# Altium PCB PCB.PcbDoc
Units mm, origin at the board's own origin, x right, y up, seen from the top; angles counter-clockwise.
Board outline 78 x 65 mm, 2 copper layers (Top Layer, Bottom Layer); 38 components, 35 nets, 139 pads, 3 vias.
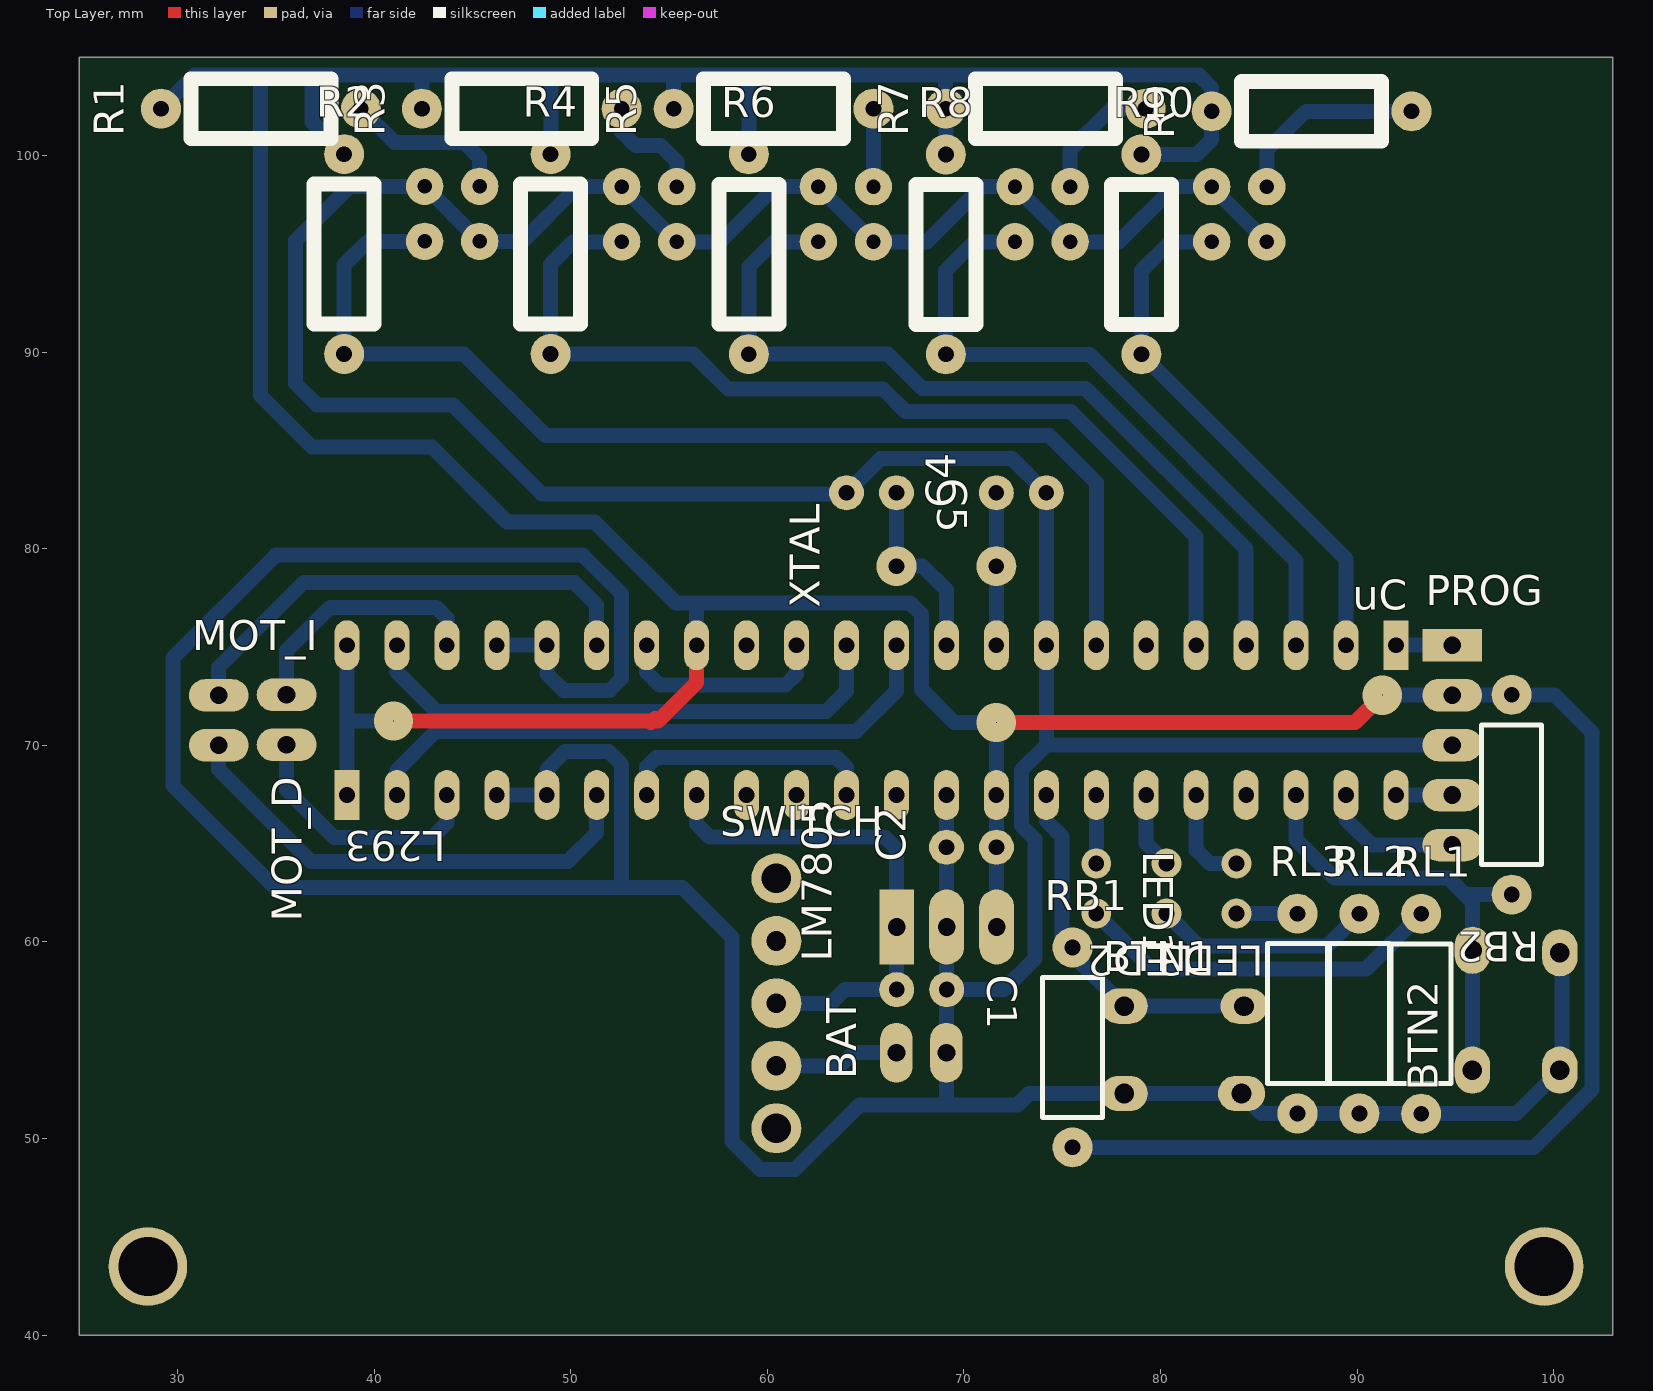
[diagram p0: Top Layer view]
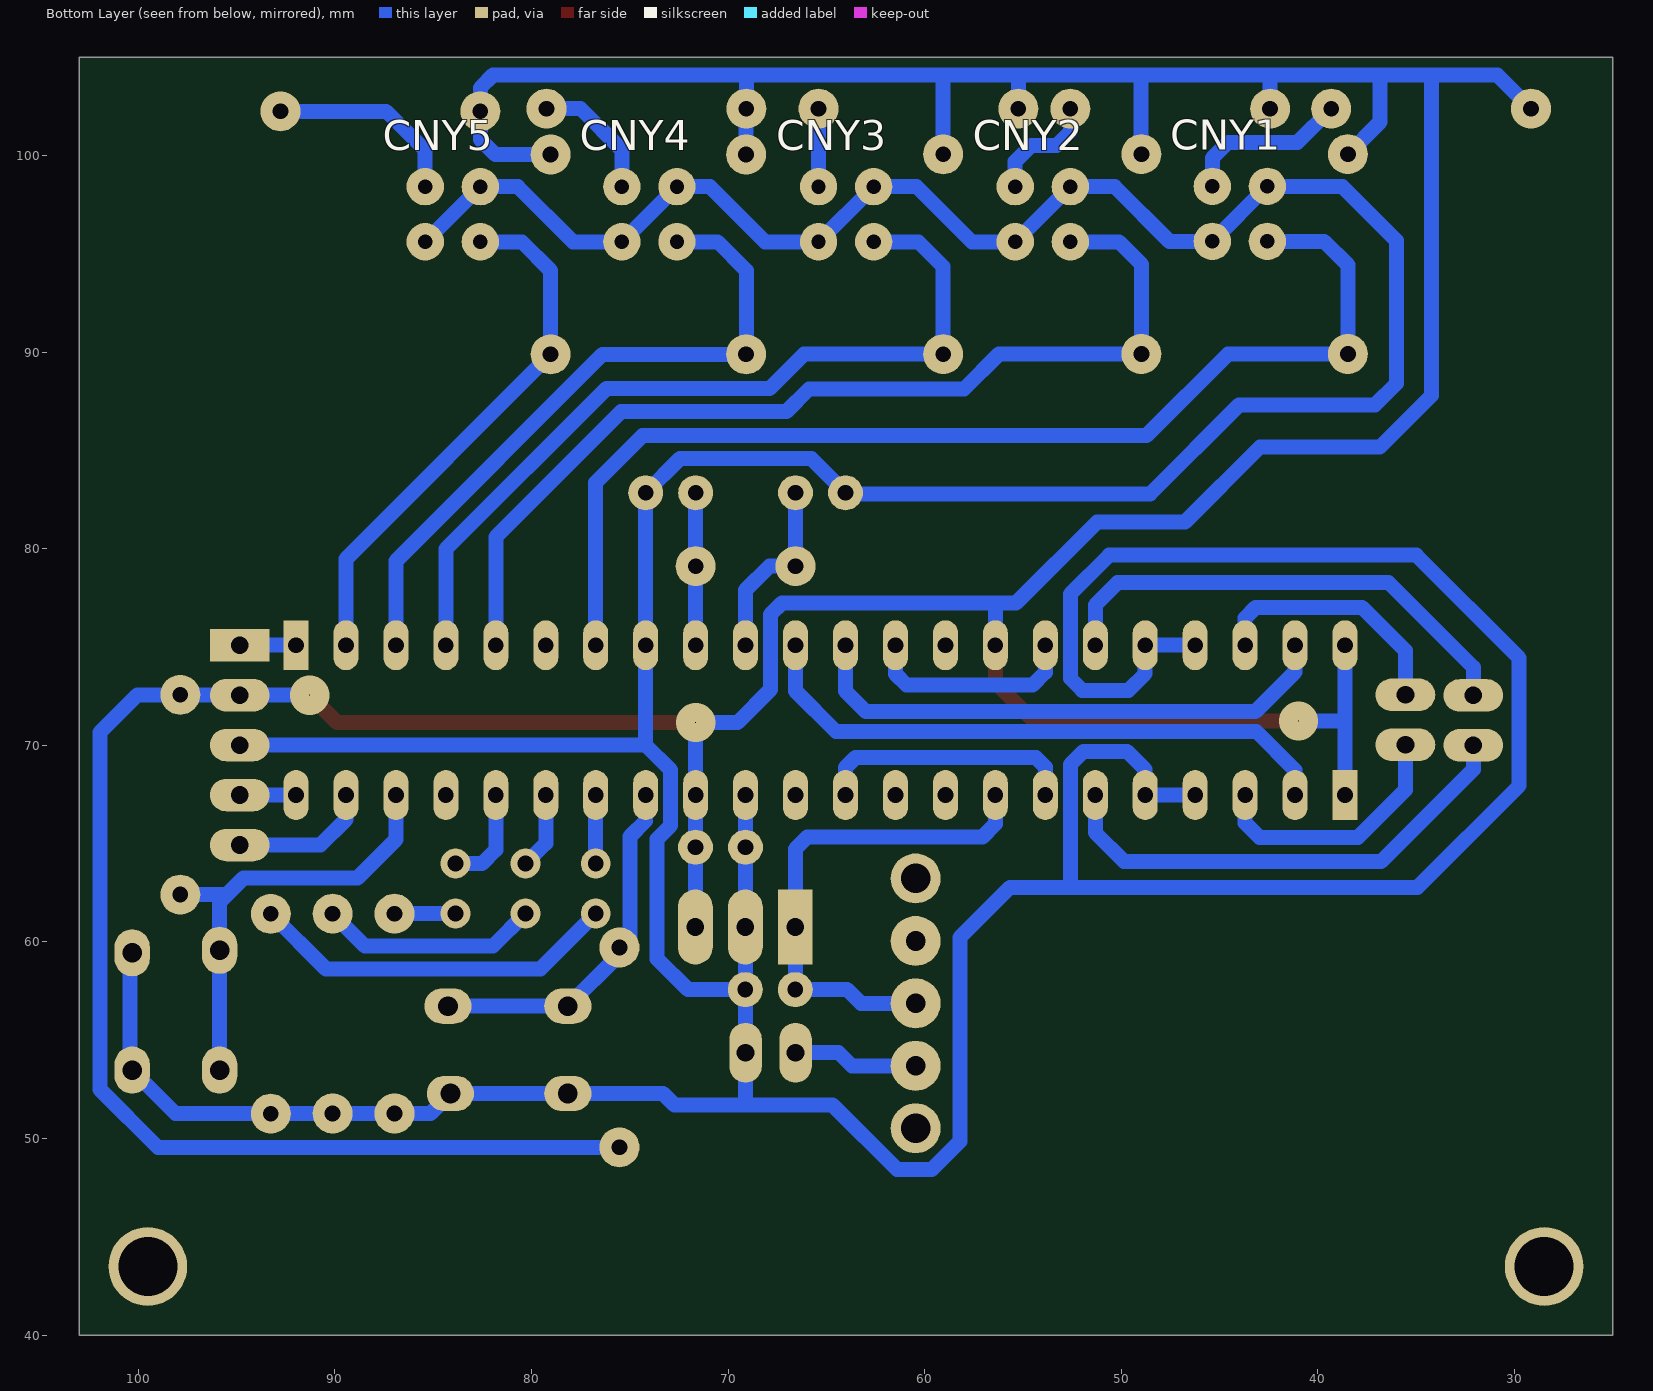
[diagram p1: Bottom Layer view, seen from below]
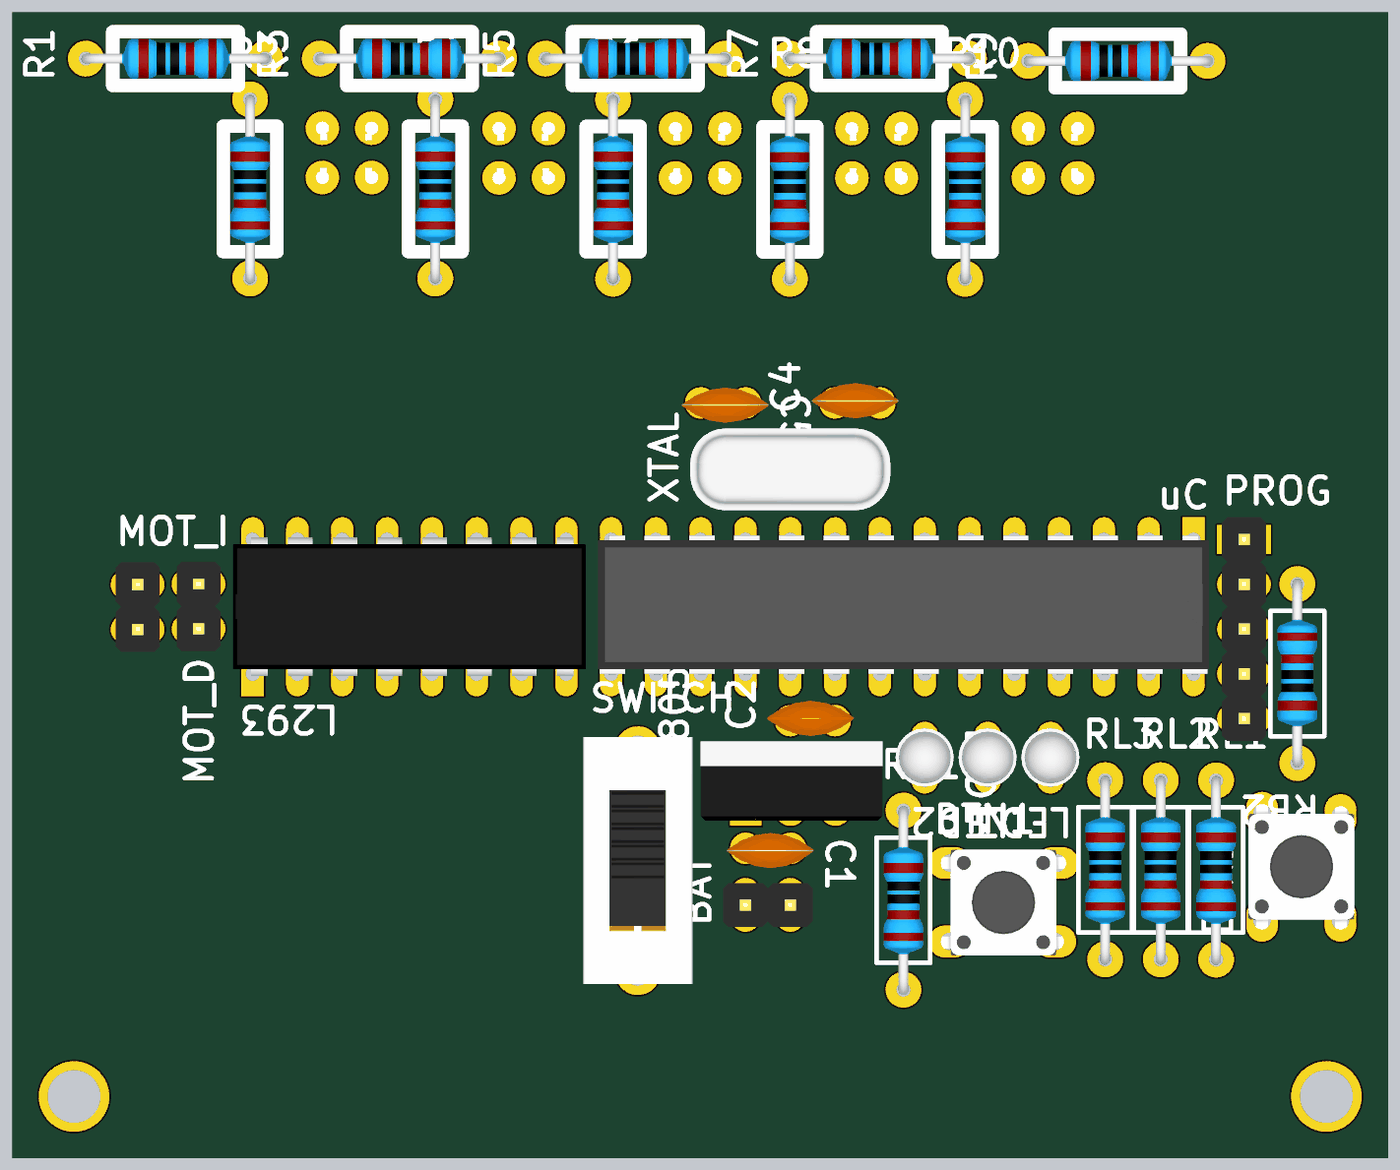
[diagram p2: 3D render of the assembled board from above, using the file's embedded part models]
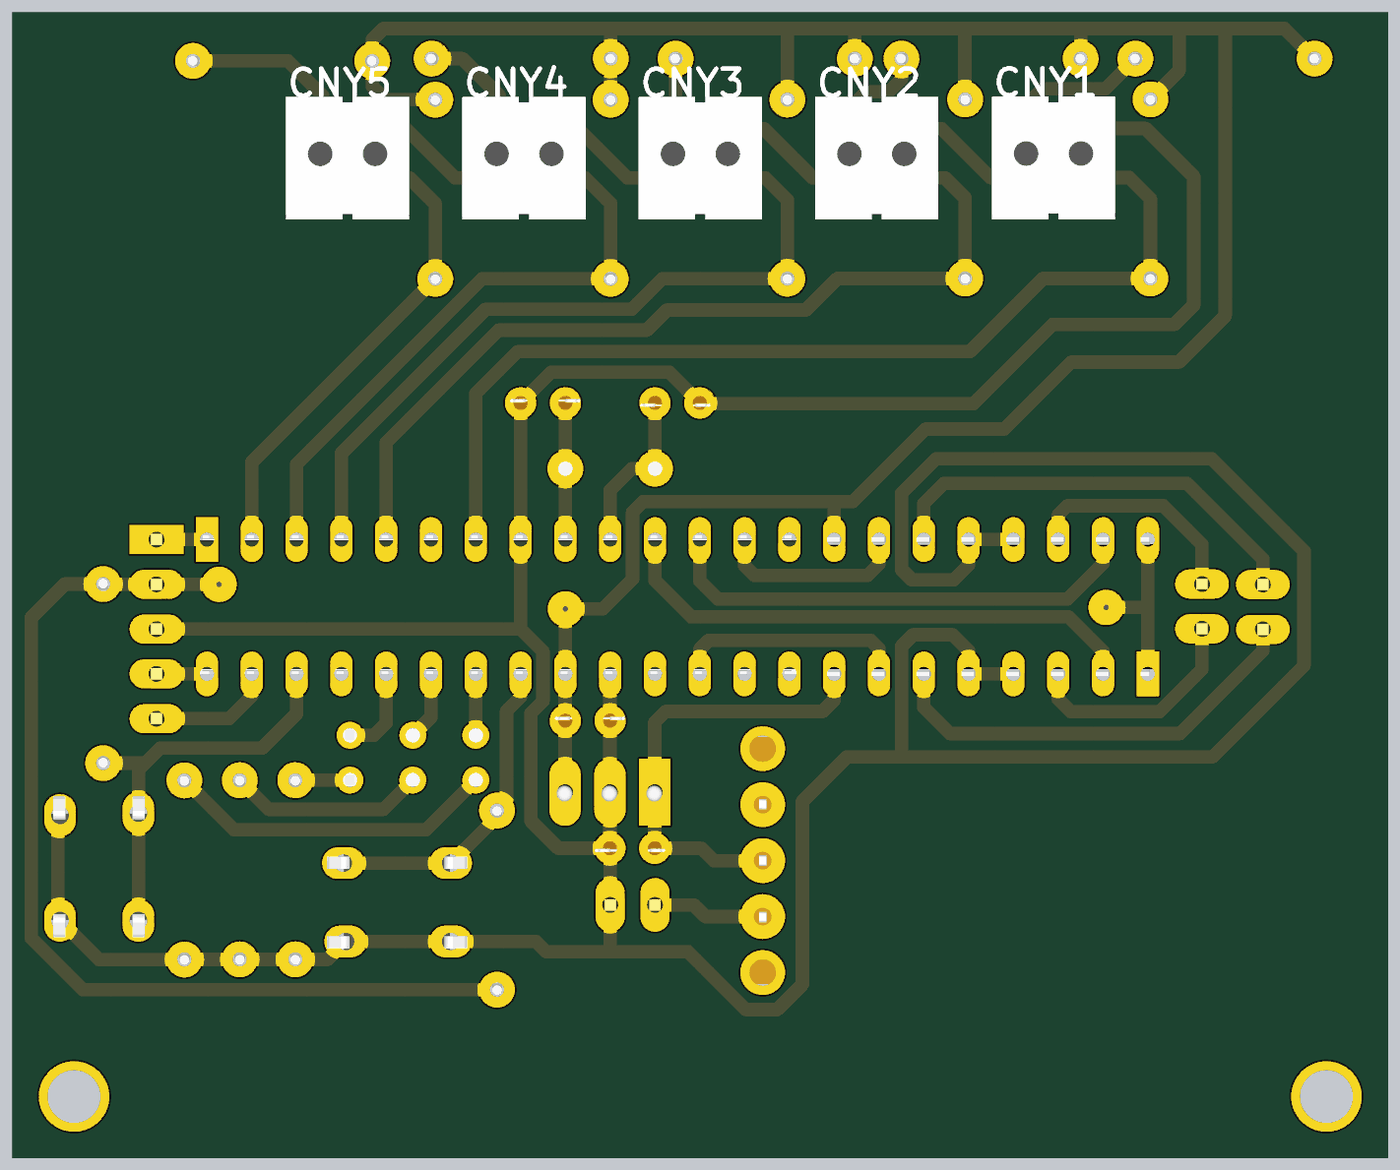
[diagram p3: 3D render of the assembled board from below, using the file's embedded part models]

## Layer stack, top to bottom
Top Solder: solder mask 0.0102, Solder Resist, Dk 3.5
Top Layer: signal copper 0.0356
Dielectric 1: dielectric 0.32, FR-4, Dk 4.8
Bottom Layer: signal copper 0.0356
Bottom Solder: solder mask 0.0102, Solder Resist, Dk 3.5

## Board outline
25,40 25,105 103,105 103,40

## Design rules (kind name [scope] priority, off if disabled: settings)
Clearance [All] p1: gap=0.254
PolygonConnect [All] p1: connectstyle=Relief reliefconductorwidth=0.254 reliefentries=4 polygonreliefangle="90 Angle" airgapwidth=0.254
RoutingVias [All] p1: holewidth=0.711 width=1.27 viastyle="Through Hole" minholewidth=0.711 minwidth=1.27 maxholewidth=0.711 maxwidth=1.27
SolderMaskExpansion [All] p1: expansion=0.102
Width [All] p1: maxlimit=0.762 minlimit=0.254 preferedwidth=0.508
30 further rules are at their usual default settings.

## Components (designator, comment, footprint, x,y, rotation, side; value= is the part's Value field where it differs from the comment)
BAT "" "HEADER 1X2" 67.835,54.37 r90 top
BTN1 "BUTTON_SMALL_4PIN" TACT_SWITCH-SMALL-4PIN 78.652,52.295 r0 top
BTN2 "BUTTON_SMALL_4PIN" TACT_SWITCH-SMALL-4PIN 100.295,53.992 r90 top
C1 "CAP-CER" CAP-CER 68.23,57.58 r0 top
C2 "CAP-CER" CAP-CER 69.999,64.82 r180 top
C4 "CAP-CER" CAP-CER 72.534,82.84 r180 top
C5 "CAP-CER" CAP-CER 65.676,82.84 r0 top
CNY1 "" CNY70 43.98,97.02 r180 bottom
CNY2 "" CNY70 54,97 r180 bottom
CNY3 "" CNY70 64,97 r180 bottom
CNY4 "" CNY70 74,97 r180 bottom
CNY5 "" CNY70 84,97 r180 bottom
L293 "L293" DIP16 38.625,67.47 r90 top
LED1 "LED" LED-3MM-RED 76.725,62.72 r270 top
LED2 "LED" LED-3MM-YELLOW 80.295,62.72 r270 top
LED3 "LED" LED-3MM-GREEN 83.855,62.72 r270 top
LM7805 "LM78XX" TO-220-STRAIGHT 66.58,60.76 r90 top
MOT_D "" "HEADER 1x2" 35.555,71.3 r180 top
MOT_I "" "HEADER 1x2" 32.105,71.27 r0 top
PROG "" "HEADER 1X5" 94.825,75.09 r0 top
R1 "RES" RES-AXIAL-400MIL 39.33,102.37 r180 top
R2 "RES" RES-AXIAL-400MIL 38.48,89.9 r90 top
R3 "RES" RES-AXIAL-400MIL 52.595,102.37 r180 top
R4 "RES" RES-AXIAL-400MIL 48.98,89.9 r90 top
R5 "RES" RES-AXIAL-400MIL 65.395,102.37 r180 top
R6 "RES" RES-AXIAL-400MIL 59.06,89.89 r90 top
R7 "RES" RES-AXIAL-400MIL 79.23,102.37 r180 top
R8 "RES" RES-AXIAL-400MIL 69.08,89.88 r90 top
R9 "RES" RES-AXIAL-400MIL 92.755,102.24 r180 top
R10 "RES" RES-AXIAL-400MIL 79.02,89.88 r90 top
RB1 "RES" RES-Axial-400mil 75.52,49.56 r90 top
RB2 "RES" RES-Axial-400mil 97.85,72.57 r270 top
RL1 "RES" RES-Axial-400mil 93.245,51.27 r90 top
RL2 "RES" RES-Axial-400mil 90.105,51.28 r90 top
RL3 "RES" RES-Axial-400mil 86.955,51.28 r90 top
SWITCH "SLIDE-SWITCH" SWITCH 60.46,56.88 r90 top
uC "PIC18F2550-I/SP" DIP28 91.965,75.09 r270 top
XTAL "XTAL" CRYSTAL-TH 69.613,79.11 r180 top

## Footprints (in the part's own frame and the unit in brackets; to place one, negate y for a bottom-side part, rotate by r counter-clockwise, add the part's x,y. Pads: shape width x height; smd on the part's side, far side on the other; paste and mask are expansions set on the pad)
CAP-CER [mil]
  round 70 hole 31.5: 1(-65,0) 2(35,0)
  body extent -107,-44 87,34, height 207
CNY70 [mm]
  round 1.9 hole 0.73: A(-1.395,1.405) C(1.405,-1.395) E(1.405,1.405) K(-1.395,-1.395)
  body extent -3.5,-3.76 3.5,3.2, height 6
CRYSTAL-TH [mil]
  round 80 hole 31.5: 1(-80,0) 2(120,0)
  body extent -203,-90 243,93, height 138
DIP16 [mm]
  rect 2.54x1.27 hole 0.8: 1(0,0)
  oval 2.54x1.27 hole 0.8: 2(0,-2.54) 3(0,-5.08) 4(0,-7.62) 5(0,-10.16) 6(0,-12.7) 7(0,-15.24) 8(0,-17.78) 9(7.62,-17.78) 10(7.62,-15.24) 11(7.62,-12.7) 12(7.62,-10.16) 13(7.62,-7.62) 14(7.62,-5.08) 15(7.62,-2.54) 16(7.62,0)
  body extent -0.12,-18.89 7.75,1.11, height 5.1
DIP28 [mm]
  rect 2.54x1.27 hole 0.8: 1(0,0)
  oval 2.54x1.27 hole 0.8: 2(0,-2.54) 3(0,-5.08) 4(0,-7.62) 5(0,-10.16) 6(0,-12.7) 7(0,-15.24) 8(0,-17.78) 9(0,-20.32) 10(0,-22.86) 11(0,-25.4) 12(0,-27.94) 13(0,-30.48) 14(0,-33.02) 15(7.62,-33.02) 16(7.62,-30.48) 17(7.62,-27.94) 18(7.62,-25.4) 19(7.62,-22.86) 20(7.62,-20.32) 21(7.62,-17.78) 22(7.62,-15.24) 23(7.62,-12.7) 24(7.62,-10.16) 25(7.62,-7.62) 26(7.62,-5.08) 27(7.62,-2.54) 28(7.62,0)
  body extent -0.25,-33.76 7.65,0.89, height 5.09
"HEADER 1X2" [mil]
  oval 120x65 hole 35.43: 1(0,50) 2(0,-50)
  body extent -49,-100 49,100, height 336
"HEADER 1x2" [mil]
  oval 120x65 hole 35.43: 1(0,50) 2(0,-50)
  body extent -49,-100 49,100, height 336
"HEADER 1X5" [mil]
  rect 120x65 hole 35.43: 1(0,0)
  oval 120x65 hole 35.43: 2(0,-100) 3(0,-200) 4(0,-300) 5(0,-400)
  body extent -49,-450 49,50, height 336
LED-3MM-GREEN [mil]
  round 60 hole 31.5: A(-50,0) K(50,0)
  body extent -66,-65 64,65, height 217
LED-3MM-RED [mil]
  round 60 hole 31.5: A(-50,0) K(50,0)
  body extent -66,-65 64,65, height 217
LED-3MM-YELLOW [mil]
  round 60 hole 31.5: A(-50,0) K(50,0)
  body extent -66,-65 64,65, height 217
RES-AXIAL-400MIL [mil]
  round 80 hole 31.5: 1(0,0) 2(400,0)
  silkscreen extent 60,-60 340,60, body extent -12,-44 410,44, height 94
RES-Axial-400mil [mil]
  round 80 hole 31.5: 1(0,0) 2(400,0)
  silkscreen extent 60,-60 340,60, body extent -12,-44 410,44, height 94
SWITCH [mm]
  round 2.54 hole 1: 1(-3.175,0) 2(0,0) 3(3.175,0)
  round 2.54 hole 1.5: 4(-6.35,0) 4(6.35,0)
  body extent -7,-3.1 7,3.1, height 9.65
TACT_SWITCH-SMALL-4PIN [mm]
  oval 2.4x1.8 hole 1: 1(-0.508,4.445) 1(5.588,4.445) 2(-0.508,0) 2(5.461,0)
  body extent -1.45,-0.79 6.53,5.21, height 5.15
TO-220-STRAIGHT [mm]
  rect 3.81x1.778 hole 0.9: 1(0,0)
  oval 3.81x1.778 hole 0.9: 2(0,-2.54) 3(0,-5.08)
  body extent -1.61,-7.75 2.88,2.55, height 16.8

## Part data
BAT MOT_D MOT_I: library part "Header 1x2"
C4 C5: library part CAPc
CNY1 CNY2 CNY3 CNY4 CNY5: library part CNY70
PROG: library part "Header Programmer"
uC: "High Performance, Enhanced Flash, USB Microcontroller with nanoWatt Technology, 32K Flash, 28-Pin SPDIP, Industrial Temperature Range"
XTAL: library part xtal

## Free pads (board coordinates)
  round 4 hole 3: 0(99.5,43.5) 1(28.5,43.5)

## Via types
v1: diameter 2, hole 0, Top Layer to Bottom Layer, 3 vias

## Nets (pads, with @x,y where several pads share a name; then routed paths per layer and width w, separated by ;. In a path a pad name is that pad's centre, name@x,y a point inside that pad or via, vN(x,y) a via of type N, cw(c..) or ccw(c..) an arc to the next point about the centre after c; other vN are vias at no path point)
BTN1: BTN1.1 RB1.2 uC.21 | length 18.5
  Bottom Layer w0.762: uC.21 74.185,66.165 74.98,65.37 74.98,60.26 RB1.2 75.52,59.364 78.144,56.74 BTN1.1@84.24,56.74
BTN2: BTN2.1 RB2.2 uC.26 | length 23.5
  Bottom Layer w0.762: uC.26 86.885,65.215 88.84,63.26 94.63,63.26 95.48,62.41 ; BTN2.1@95.85,53.494 95.85,59.58 95.85,62.04 95.48,62.41 ; RB2.2 95.48,62.41
CNY1: CNY1.C R2.1 uC.7 | length 58.3
  Bottom Layer w0.762: CNY1.C 39.685,95.625 38.48,94.42 R2.1 44.57,89.9 48.72,85.75 74.34,85.75 76.725,83.365 uC.7
CNY2: CNY2.C R4.1 uC.5 | length 50.8
  Bottom Layer w0.762: CNY2.C 50.125,95.605 48.98,94.46 R4.1 56.22,89.9 58.01,88.11 65.89,88.11 67.03,86.97 75.43,86.97 81.805,80.595 uC.5
CNY3: CNY3.C R6.1 uC.4 | length 42.8
  Bottom Layer w0.762: CNY3.C 60.325,95.605 59.06,94.34 R6.1 66.14,89.89 67.88,88.15 76.18,88.15 84.345,79.985 uC.4
CNY4: CNY4.C R8.1 uC.3 | length 34.8
  Bottom Layer w0.762: CNY4.C 70.525,95.605 69.07,94.15 69.07,89.89 R8.1 76.38,89.88 86.885,79.375 uC.3
CNY5: CNY5.C R10.1 uC.2 | length 27.5
  Bottom Layer w0.762: CNY5.C 80.485,95.605 79.02,94.14 R10.1 89.425,79.475 uC.2
GND: BAT.2 BTN1.2 BTN2.2 C1.2 C2.2 C4.1 C5.1 CNY1.E CNY1.K CNY2.E CNY2.K CNY3.E CNY3.K CNY4.E CNY4.K CNY5.E CNY5.K L293.4 L293.5 L293.12 L293.13 LM7805.2 PROG.3 RL1.1 RL2.1 RL3.1 uC.8 uC.19 | length 329.4
  Bottom Layer w0.762: L293.4 L293.5 48.785,68.765 49.714,69.694 51.926,69.694 52.595,69.025 52.595,62.77 ; L293.13 L293.12 48.785,73.645 49.63,72.8 51.99,72.8 52.595,73.405 52.595,77.695 50.62,79.67 35,79.67 29.77,74.44 29.77,67.95 34.95,62.77 52.595,62.77 ; uC.19 69.12,67.455 LM7805.2 69.12,57.581 C1.2 ; CNY5.K CNY5.E 80.685,98.405 77.885,95.605 CNY4.K CNY4.E 70.915,98.405 68.115,95.605 CNY3.K CNY3.E 60.405,98.405 57.605,95.605 CNY2.K CNY2.E 50.335,98.405 47.555,95.625 CNY1.K CNY1.E 42.575,98.409 38.759,98.409 36.02,95.67 36.02,88.39 37.11,87.3 44.02,87.3 48.53,82.79 63.975,82.79 C5.1 65.765,84.58 72.445,84.58 C4.1 uC.8 74.185,70.01 ; PROG.3 74.185,70.01 ; BTN2.2@100.41,59.463 100.41,53.599 100.295,53.484 98.081,51.27 RL1.1 93.235,51.28 RL2.1 RL3.1 85.128,51.28 84.113,52.295 78.144,52.295 73.305,52.295 72.725,51.715 69.105,51.715 ; 52.595,62.77 55.67,62.77 58.21,60.23 58.21,49.86 59.64,48.43 61.4,48.43 64.685,51.715 69.105,51.715 ; 69.105,51.715 BAT.2 69.105,57.566 C1.2 ; C1.2 72.04,57.58 73.6,59.14 73.6,65.24 72.915,65.925 72.915,68.631 72.915,68.74 74.185,70.01
LED1: LED1.A uC.22 | length 3.5
  Bottom Layer w0.762: LED1.A uC.22
LED2: LED2.A uC.23 | length 3.9
  Bottom Layer w0.762: uC.23 79.265,65.02 LED2.A
LED3: LED3.A uC.24 | length 5.1
  Bottom Layer w0.762: uC.24 81.805,64.685 82.5,63.99 LED3.A
MCLR: PROG.1 uC.1 | length 2.9
  Bottom Layer w0.762: uC.1 PROG.1
MOTDA: L293.2 uC.11 | length 30.7
  Bottom Layer w0.762: L293.2 41.165,68.735 43.14,70.71 64.515,70.71 66.565,72.76 uC.11
MOTDB: L293.15 uC.12 | length 27.8
  Bottom Layer w0.762: L293.15 41.165,73.735 43.174,71.726 62.996,71.726 64.025,72.755 uC.12
MOTIA: L293.10 uC.13 | length 11
  Bottom Layer w0.762: L293.10 53.865,73.71 54.515,73.06 60.915,73.06 61.485,73.63 uC.13
MOTIB: L293.7 uC.17 | length 13.4
  Bottom Layer w0.762: L293.7 53.865,68.9 54.345,69.38 63.515,69.38 64.025,68.87 uC.17
NetBAT_1: BAT.1 SWITCH.1 | length 6.4
  Bottom Layer w0.762: SWITCH.1 63.705,53.705 64.37,54.37 BAT.1
NetCNY1_A: CNY1.A R1.1 | length 8.5
  Bottom Layer w0.762: R1.1 41.05,100.65 44.59,100.65 45.375,99.865 CNY1.A
NetCNY2_A: CNY2.A R3.1 | length 5.9
  Bottom Layer w0.762: R3.1 52.595,101.195 53.29,100.5 54.58,100.5 55.395,99.685 CNY2.A
NetCNY3_A: CNY3.A R5.1 | length 4
  Bottom Layer w0.762: CNY3.A R5.1
NetCNY4_A: CNY4.A R7.1 | length 6.6
  Bottom Layer w0.762: CNY4.A 75.395,100.275 77.49,102.37 R7.1
NetCNY5_A: CNY5.A R9.1 | length 10
  Bottom Layer w0.762: CNY5.A 85.395,100.255 87.38,102.24 R9.1
NetLED1_K: LED1.K RL1.2 | length 18.8
  Bottom Layer w0.762: LED1.K 79.545,58.63 90.445,58.63 RL1.2
NetLED2_K: LED2.K RL2.2 | length 11.2
  Bottom Layer w0.762: LED2.K 81.956,59.789 88.454,59.789 RL2.2
NetLED3_K: LED3.K RL3.2 | length 3.1
  Bottom Layer w0.762: LED3.K 86.945,61.45 RL3.2
OMOTDA: L293.3 MOT_D.1 | length 13.2
  Bottom Layer w0.762: MOT_D.1 35.555,67.737 37.972,65.32 42.975,65.32 43.705,66.05 L293.3
OMOTDB: L293.14 MOT_D.2 | length 12.9
  Bottom Layer w0.762: MOT_D.2 35.555,74.81 37.755,77.01 43.175,77.01 43.705,76.48 L293.14
OMOTIA: L293.11 MOT_I.1 | length 24.9
  Bottom Layer w0.762: MOT_I.1 32.105,73.97 36.405,78.27 50.195,78.27 51.325,77.14 L293.11
OMOTIB: L293.6 MOT_I.2 | length 24.9
  Bottom Layer w0.762: MOT_I.2 32.105,68.77 36.785,64.09 49.855,64.09 51.325,65.56 L293.6
PGC: PROG.5 uC.27 | length 7.2
  Bottom Layer w0.762: uC.27 89.425,66.235 90.73,64.93 PROG.5
PGD: PROG.4 uC.28 | length 2.9
  Bottom Layer w0.762: uC.28 PROG.4
VBAT: C1.1 L293.8 LM7805.1 SWITCH.2 | length 25.7
  Bottom Layer w0.762: L293.8 56.405,65.995 57.06,65.34 65.97,65.34 66.58,64.73 LM7805.1 66.579,60.759 C1.1 63.94,57.58 63.24,56.88 SWITCH.2
VCC: C2.1 L293.1 L293.9 L293.16 LM7805.3 PROG.2 R1.2 R2.2 R3.2 R4.2 R5.2 R6.2 R7.2 R8.2 R9.2 R10.2 RB1.1 RB2.1 uC.20 | length 262.3
  Top Layer w0.762: v1(40.99,71.24) 53.985,71.24 54.075,71.15 54.295,71.37 54.435,71.23 56.405,73.2 L293.9 ; v1(71.645,71.16) 89.885,71.16 v1(91.275,72.55)
  Bottom Layer w0.762: R1.2 30.88,104.08 34.24,104.08 ; R2.2 36.85,101.69 36.85,104.08 ; L293.1 38.625,71.23 ; L293.16 38.625,71.23 ; v1(40.99,71.24) 38.635,71.24 38.625,71.23 ; R3.2 42.435,104.08 ; R4.2@49,100.06 49,104.08 ; R5.2 55.235,104.08 ; L293.9 56.405,77.24 ; R6.2 59.06,104.08 ; R8.2 69.08,102.36 R7.2 69.07,104.08 ; LM7805.3 71.66,67.455 uC.20 v1(71.645,71.16) 69.51,71.16 67.835,72.835 67.835,76.66 67.255,77.24 56.405,77.24 ; RB1.1 98.99,49.56 101.93,52.5 101.93,70.66 100.02,72.57 RB2.1 ; R10.2 81.83,100.04 82.595,100.805 R9.2 82.595,103.435 81.95,104.08 69.07,104.08 ; v1(91.275,72.55) PROG.2 RB2.1@97.85,72.55 ; 34.24,104.08 36.85,104.08 ; 34.24,104.08 34.24,87.78 36.86,85.16 42.96,85.16 46.76,81.36 51.23,81.36 55.35,77.24 56.405,77.24 ; 36.85,104.08 42.435,104.08 ; 42.435,104.08 49,104.08 ; 49,104.08 55.235,104.08 ; 55.235,104.08 59.06,104.08 ; 59.06,104.08 69.07,104.08
XTAL1: C4.2 uC.9 XTAL.1 | length 7.8
  Bottom Layer w0.762: uC.9 XTAL.1 C4.2
XTAL2: C5.2 uC.10 XTAL.2 | length 9.6
  Bottom Layer w0.762: C5.2 XTAL.2 67.89,79.11 69.105,77.895 uC.10
pads on no net: SWITCH.3 SWITCH.4 uC.6 uC.14 uC.15 uC.16 uC.18 uC.25

## Silkscreen, mask and mechanical layers (free items; w line width, h text height)
Mechanical 1:
  the board outline again, w0.762